# EAGLE board cansat (EAGLE 9.6.2)

Size 85 x 100 mm. Coordinates in mm from the lower left corner, seen from the top.
Outline: 0,0 85,0 85,100 0,100 0,0
Copper layers (1*16): Top 0.035mm / dielectric 1.5mm / Bottom 0.035mm
Design rules "PCBGoGo": minimum track width 6mil, minimum drill 0.2mm, track to track 6mil, track to pad 6mil, pad to pad 6mil, via to via 6mil, smd to smd 6mil, copper to edge 0.2mm, drill to drill 6mil, minimum pad ring 10mil, minimum via ring 8mil, stop-mask expansion 4mil, vias tented up to drill 0mil, thermal gap 10mil
Net classes: 1 esp: width 0.254 mm, drill 0.127 mm, clearance 0.025 mm; 2 GND_+12V: width 0.305 mm

## Footprints (pad centres in the part's own frame; a part is rotated, then mirrored left to right if it is on the bottom)
C0603 = smd 1.1 x 1: 1 -0.85,0; 2 0.85,0
AZ1117CH-3.3TRG1 = smd 1.2 x 2.2: 1 -2.3,-6.2; 2 0,-6.2; 3 2.3,-6.2 | smd 3.5 x 2.2: VOUT 0,0
3362P = drill 0.7 pad 1.27 square: CCW -2.54,2.54; CW 2.54,2.54; WIPER 0,0
BMX055 = drill 0.65 pad 1.5 square: 3V3 8.81,-9.53; GND 1.19,-4.46; SCL 1.19,-9.53; SDA 1.19,-7; VCC 8.81,-4.46; VCCIO 8.81,-7
C0402 = smd 0.7 x 0.9: 1 -0.65,0; 2 0.65,0
2PIN = drill 1.2 pad 2.5: 1 0,0; 2 5.08,0
TS-06104 = smd 1 x 1.8: A -2.25,4.1; B -2.25,-4.1; C 2.25,4.1; D 2.25,-4.1
ESP32-WROOM-32D = smd 2 x 0.9: 1_GND -7.5,7.62; 2_3V3 -7.5,6.35; 3_EN -7.5,5.08; 4_SENSOR_VP -7.5,3.81; 5_SENSOR_VN -7.5,2.54; 6_IO34 -7.5,1.27; 7_IO35 -7.5,0; 8_IO32 -7.5,-1.27; 9_IO33 -7.5,-2.54; 10_IO25 -7.5,-3.81; 11_IO26 -7.5,-5.08; 12_IO27 -7.5,-6.35; 13_IO14 -7.5,-7.62; 14_IO12 -7.5,-8.89; 25_IO0 9.5,-8.89; 26_IO4 9.5,-7.62; 27_IO16 9.5,-6.35; 28_IO17 9.5,-5.08; 29_IO5 9.5,-3.81; 30_IO18 9.5,-2.54; 31_IO19 9.5,-1.27; 32_NC 9.5,0; 33_IO21 9.5,1.27; 34_RXD0 9.5,2.54; 35_TXD0 9.5,3.81; 36_IO22 9.5,5.08; 37_IO23 9.5,6.35; 38_GND 9.5,7.62 | smd 0.9 x 2: 15_GND -4.715,-10.1; 16_IO13 -3.445,-10.1; 17_SD2 -2.175,-10.1; 18_SD3 -0.905,-10.1; 19_CMD 0.365,-10.1; 20_CLK 1.635,-10.1; 21_SD0 2.905,-10.1; 22_SD1 4.175,-10.1; 23_IO15 5.445,-10.1; 24_IO2 6.715,-10.1 | smd 1.33 x 1.33: GND@1 -1.8,1.835; GND@2 0,1.835; GND@3 1.835,1.835; GND@4 -1.8,0; GND@5 0,0; GND@6 1.835,0; GND@7 -1.8,-1.835; GND@8 0,-1.835; GND@9 1.835,-1.835
AE-GYSFDMAXB = drill 0.8 long: P1 13.716,5.08; P2 13.716,2.54; P3 13.716,0; P4 13.716,-2.54; P5 13.716,-5.08 | hole 3.2: -12,12; 12,12; 12,-12; -12,-12
IM920C = smd 0.3 x 1.1: $P1 -1.75,-13.45; $P2 -1.75,-9.55; $P3 -2.25,-13.45; $P4 -2.25,-9.55; $P5 -2.75,-13.45; $P6 -2.75,-9.55; $P7 -3.25,-13.45; $P8 -3.25,-9.55; $P9 -3.75,-13.45; $P10 -3.75,-9.55; $P11 -4.25,-13.45; $P12 -4.25,-9.55; $P13 -4.75,-13.45; $P14 -4.75,-9.55; $P15 -5.25,-13.45; $P16 -5.25,-9.55; $P17 -5.75,-13.45; $P18 -5.75,-9.55; $P19 -6.25,-13.45; $P20 -6.25,-9.55 | hole 2.5: 7,-12 | hole 2: -7,14
OSXX1608C1A = smd 0.8 x 0.8: AN -0.75,0; CT 0.75,0
BD6231F = smd 3.81 x 0.635: FIN -2.54,-1.905; GND 2.54,1.905; OUT1 -2.54,1.905; OUT2 2.54,0.635; RIN 2.54,-1.905; VCC1 -2.54,0.635; VCC2 -2.54,-0.635; VREF 2.54,-0.635
19_2.54 = drill 0.6 pad 1.27 square: P$1 0,12.7; P$2 0,10.16; P$3 0,7.62; P$4 0,5.08; P$5 0,2.54; P$6 0,0; P$7 0,-2.54; P$8 0,-5.08; P$9 0,-7.62; P$10 0,-10.16; P$11 0,-12.7; P$12 0,-15.24; P$13 0,-17.78; P$14 0,-20.32; P$15 0,-22.86; P$16 0,-25.4; P$17 0,-27.94; P$18 0,-30.48; P$19 0,-33.02
R0603 = smd 1 x 1.1: 1 -0.85,0; 2 0.85,0
R0201 = smd 0.28 x 0.43: 1 -0.255,0; 2 0.255,0
RASPBERRYPI4B = drill 0.6 square: 3V3_1 -2.54,-2.54; 3V3_2 -2.54,-22.86; 5V_1 0,-2.54; 5V_2 0,-5.08; GND_1 0,-7.62; GND_2 0,-17.78; GND_3 0,-25.4; GND_4 0,-38.1; GND_5 0,-43.18; GND_6 -2.54,-12.7; GND_7 -2.54,-33.02; GND_8 -2.54,-50.8; GPIO0 -2.54,-35.56; GPIO1 0,-35.56; GPIO2 -2.54,-5.08; GPIO3 -2.54,-7.62; GPIO4 -2.54,-10.16; GPIO5 -2.54,-38.1; GPIO6 -2.54,-40.64; GPIO7 0,-33.02; GPIO8 0,-30.48; GPIO9 -2.54,-27.94; GPIO10 -2.54,-25.4; GPIO11 -2.54,-30.48; GPIO12 0,-40.64; GPIO13 -2.54,-43.18; GPIO14 0,-10.16; GPIO15 0,-12.7; GPIO16 0,-45.72; GPIO17 -2.54,-15.24; GPIO18 0,-15.24; GPIO19 -2.54,-45.72; GPIO20 0,-48.26; GPIO21 0,-50.8; GPIO22 -2.54,-20.32; GPIO23 0,-20.32; GPIO24 0,-22.86; GPIO25 0,-27.94; GPIO26 -2.54,-48.26; GPIO27 -2.54,-17.78
3_2.54 = drill 0.7 pad 1.27 square: 1 -2.54,0; 2 0,0; 3 2.54,0
NPN_SS8050-G = smd 0.6 x 0.8: 1 -0.95,-2.02; 2 0.95,-2.02; 3 0,0
ESD5484FCT5G = smd 0.28 x 0.3: 1_CT -0.235,0; 2_AN 0.235,0
QFN50P500X500X80-29N = smd 1.01 x 0.27: 1 -2.36,1.5; 2 -2.36,1; 3 -2.36,0.5; 4 -2.36,0; 5 -2.36,-0.5; 6 -2.36,-1; 7 -2.36,-1.5; 15 2.36,-1.5; 16 2.36,-1; 17 2.36,-0.5; 18 2.36,0; 19 2.36,0.5; 20 2.36,1; 21 2.36,1.5 | smd 0.27 x 1.01: 8 -1.5,-2.36; 9 -1,-2.36; 10 -0.5,-2.36; 11 0,-2.36; 12 0.5,-2.36; 13 1,-2.36; 14 1.5,-2.36; 22 1.5,2.36; 23 1,2.36; 24 0.5,2.36; 25 0,2.36; 26 -0.5,2.36; 27 -1,2.36; 28 -1.5,2.36 | smd 3.25 x 3.25: 29 0,0
5V3A_KIC-053 = drill 0.7 pad 1.27 square: GND1 11.01,0; GND2 8.47,0; VADJ -14.39,0; VIN1 16.09,0; VIN2 13.55,0; VOUT1 -9.31,0; VOUT2 -11.85,0
3.3V0.5A_M78AR05-0.5 = drill 0.75 pad 1.27 square: GND 0,0; VIN 2.54,0; VOUT -2.54,0
GY-BMP280-FOOTPRINT = drill 0.6: CSB 11.43,0; GND 3.81,0; SCK 6.35,0; SDI 8.89,0; SDO 13.97,0; VCC 1.27,0 | hole 0.35: 1.27,7.62; 13.97,7.62
SSM6J808R = smd 0.44 x 0.33: D1 0,0; D2 0.95,0; D3 0.01,2.64; D4 0.95,2.64; G 1.9,0; S 1.9,2.64
SLIDESWITCH = drill 0.6 pad 1.422 square: A 0,0; B 5.08,0; C 2.54,0
4_2.54 = drill 0.7 pad 1.27 square: 1 -3.81,0; 2 -1.27,0; 3 1.27,0; 4 3.81,0
MICRO-B_ZX62R-B-5P = smd 0.4 x 1.35: 1 1.3,0; 2 0.65,0; 3 0,0; 4 -0.65,0; 5 -1.3,0 | smd 2.1 x 2: P$6 3.1,-0.325; P$7 -3.1,-0.325 | smd 1.6 x 1.9: P$8 -4.1,-2.675; P$9 4.1,-2.675 | smd 1.2 x 1.9: P$10 0.85,-2.675; P$11 -0.9,-2.675

## Placement (x,y rotation side)
0.1μF  [C0603]  67.31,60.96 0 top
3-REG2  [AZ1117CH-3.3TRG1]  55.88,91.44 0 top
100KR  100kR  [3362P]  6.86,64.77 90 top
100μF  [C0603]  73.66,60.96 0 top
BMX1  BMX055  [BMX055]  31.75,50.8 0 top
C1  4.7uF  [C0603]  80.01,60.96 0 top
C2  4.7uF  [C0603]  80.01,64.77 0 top
C3  4.7uF  [C0603]  80.01,68.58 0 top
C4  4.7uF  [C0603]  73.66,68.58 0 top
C5  4.7uF  [C0603]  67.31,68.58 0 top
C7  1000uF  [C0603]  60.96,60.96 0 top
C8  1000uF  [C0603]  54.61,60.96 0 top
C9  0.1uF  [C0603]  60.96,68.58 0 top
C10  0.1uF  [C0603]  54.61,68.58 0 top
C11  1000uF  [C0603]  80.01,72.39 0 top
C12  22uf  [C0603]  60.96,76.2 0 top
C13  22uf  [C0603]  54.61,76.2 0 top
C14  0.1uF  [C0603]  80.01,80.01 0 top
C15  0.1uF  [C0603]  73.66,80.01 0 top
C16  4.7uF  [C0402]  80.01,57.15 0 top
C17  0.1uF  [C0603]  67.31,80.01 0 top
C18  0.1uF  [C0603]  60.96,80.01 0 top
C19  22uF  [C0603]  67.31,76.2 0 top
C20  0.1uF  [C0603]  54.61,80.01 0 top
CONNECTOR1  2PIN  [2PIN]  2.54,96.52 0 top
EN1  TS-06104  [TS-06104]  50.8,20.32 0 top
ESP32_WROOM32D  ESP32-WROOM-32D  [ESP32-WROOM-32D]  54.86,40.64 0 top
GPS  AE-GYSFDMAXB  [AE-GYSFDMAXB]  24.13,17.78 0 top
IM  IM920C  [IM920C]  19.05,49.53 0 top
IO1  TS-06104  [TS-06104]  60.96,20.32 0 top
L2  OSXX1608C1A  [OSXX1608C1A]  74.93,43.18 90 top
MD_L  [BD6231F]  77.47,88.9 0 top
MD_R  [BD6231F]  66.04,88.9 0 top
OUT_MD_L  2PIN  [2PIN]  74.93,96.52 0 top
OUT_MD_R  2PIN  [2PIN]  63.5,96.52 0 top
PIN_L  19_2.54  [19_2.54]  44.45,35.56 0 top
PIN_R  19_2.54  [19_2.54]  67.31,35.56 0 top
R1  150R  [R0603]  73.66,76.2 0 top
R2  150R  [R0603]  73.66,64.77 0 top
R3  150R  [R0603]  67.31,64.77 0 top
R4  150R  [R0603]  60.96,64.77 0 top
R5  150R  [R0603]  54.61,64.77 0 top
R6  150R  [R0603]  80.01,76.2 0 top
R7  2.2kR  [R0603]  73.66,72.39 0 top
R8  2.2kR  [R0603]  67.31,72.39 0 top
R9  3.3kR  [R0603]  60.96,72.39 0 top
R10  3.3kR  [R0603]  54.61,72.39 0 top
R11  10kR  [R0603]  7.62,90.17 0 top
R14  2k  [R0201]  72.39,38.1 0 top
R15  10k  [R0201]  72.39,22.86 0 top
R16  10k  [R0201]  72.39,20.32 0 top
R17  2k  [R0201]  72.39,35.56 0 top
R18  10k  [R0201]  72.39,25.4 0 top
R19  22k  [R0201]  72.39,27.94 0 top
R20  47k  [R0201]  72.39,30.48 0 top
R21  10k  [R0201]  72.39,33.02 0 top
RASPBERRYPI_4B  [RASPBERRYPI4B]  5.08,53.34 0 top
SERVO1  [3_2.54]  35.56,96.52 0 top
SERVO2  [3_2.54]  27.94,96.52 0 top
T3  [NPN_SS8050-G]  63.5,8.89 0 top
T4  [NPN_SS8050-G]  63.5,12.7 0 top
TVC4  [ESD5484FCT5G]  74.93,38.1 0 top
TVC5  [ESD5484FCT5G]  74.93,33.02 0 top
TVC6  [ESD5484FCT5G]  74.93,35.56 0 top
U2  CP2102N-A01-GQFN28  [QFN50P500X500X80-29N]  55.63,10.67 0 top
U$1  OSXX1608C1A  [OSXX1608C1A]  77.47,43.18 90 top
U$2  OSXX1608C1A  [OSXX1608C1A]  80.01,43.18 90 top
U$3  OSXX1608C1A  [OSXX1608C1A]  80.01,48.26 90 top
U$4  OSXX1608C1A  [OSXX1608C1A]  77.47,48.26 90 top
U$5  OSXX1608C1A  [OSXX1608C1A]  74.93,48.26 90 top
U$6  OSXX1608C1A  [OSXX1608C1A]  72.39,48.26 90 top
U$7  5V3A_KIC-053  [5V3A_KIC-053]  30.48,74.93 0 top
U$8  3.3V0.5A_M78AR05-0.5  [3.3V0.5A_M78AR05-0.5]  6.35,74.93 270 top
U$9  GY-BPM280  [GY-BMP280-FOOTPRINT]  30.48,55.88 0 top
U$10  PCH_SSM6J808R  [SSM6J808R]  6.35,83.82 0 top
U$11  PCH_SSM6J808R  [SSM6J808R]  2.54,83.82 0 top
U$12  SLIDESWITCH  [SLIDESWITCH]  15.24,96.52 0 top
U$13  [4_2.54]  54.61,96.52 0 top
U$14  [4_2.54]  44.45,96.52 0 top
USB2  [MICRO-B_ZX62R-B-5P]  55.75,3.94 0 top

## Library data of the parts
0.1μF 100μF C1-C5 C7-C20 = rcl; SPICEPREFIX: C
3-REG2 = Chip 3-Terminal Regulator
100KR = TRIM_register
BMX1 = BMX055
CONNECTOR1 OUT_MD_L OUT_MD_R = 2pin_small
EN1 IO1 = Switches
ESP32_WROOM32D = ESP32
GPS = AE-GYSFDMAXB
IM = IM920
L2 U$1-U$6 = ChipLED
MD_L MD_R = Motor Driver
PIN_L PIN_R SERVO1 SERVO2 U$13 U$14 = JumperPins
R1-R11 R14-R21 = rcl; SPICEPREFIX: R
RASPBERRYPI_4B = RASPBERRYPI4B
T3 T4 = ChipTransister
TVC4-TVC6 = TVC Diode
U2 = CP2102N-A01-GQFN28; AVAILABILITY: In Stock; DESCRIPTION: USB Bridge, USB to UART USB 2.0 UART Interface 28-QFN (5x5); MF: Silicon Labs; MP: CP2102N-A01-GQFN28; PACKAGE: QFN-28 Silicon Labs; PRICE: None; PURCHASE-URL: https://pricing.snapeda.com/search/part/CP2102N-A01-GQFN28/?ref=eda
U$7 U$8 = DC-DC
U$9 = BMP280
U$10 U$11 = CHIPMOSFET
U$12 = SLIDESWITCH
USB2 = USB

## Nets
3V3: BMX1.3V3
+3V3: 3-REG2.2 3-REG2.VOUT C4.2 C5.2 C12.1 C16.1 C17.1 C18.1 C19.1 ESP32_WROOM32D.2_3V3 IM.$P17 PIN_L.P$1 R17.1 R21.2 U2.6 U2.7 U$8.VOUT U$9.CSB U$9.VCC
+5V: 3-REG2.3 100KR.CCW BMX1.VCC C1.1 C2.1 C3.1 C10.2 C11.2 C13.1 GPS.P1 PIN_L.P$19 R14.2 R19.1 RASPBERRYPI_4B.5V_1 SERVO1.2 SERVO2.2 TVC4.2_AN U$7.VOUT1 U$7.VOUT2 U$8.VIN U$13.3 U$14.3 USB2.1
+12V [GND_+12V]: C7.1 C8.1 C9.1 U$7.VIN1 U$7.VIN2 U$11.D4
+D: TVC6.2_AN U2.4 USB2.3
-D: TVC5.2_AN U2.5 USB2.2
AS_SCL: PIN_R.P$3 R7.2 U$13.1 U$14.1
AS_SDA: PIN_R.P$6 R8.2 U$13.2 U$14.2
BB_SCL: BMX1.SCL RASPBERRYPI_4B.GPIO3 U$9.SCK
BB_SDA: BMX1.SDA RASPBERRYPI_4B.GPIO2 U$9.SDI
CLK: ESP32_WROOM32D.20_CLK PIN_R.P$19
CMD: ESP32_WROOM32D.19_CMD PIN_L.P$18
CP_RX: ESP32_WROOM32D.35_TXD0 PIN_R.P$4 U2.25
CP_TX: ESP32_WROOM32D.34_RXD0 PIN_R.P$5 U2.26
CPVBUS: R19.2 R20.2 U2.8
DTR: R16.1 T4.2 U2.28
EN: C15.1 C20.1 EN1.D ESP32_WROOM32D.3_EN PIN_L.P$2 R21.1 T3.3
GND [GND_+12V]: 0.1μF.2 3-REG2.1 100KR.CW 100μF.2 BMX1.GND C1.2 C2.2 C3.2 C4.1 C5.1 C7.2 C8.2 C9.2 C10.1 C11.1 C12.2 C13.2 C14.2 C15.2 C16.2 C17.2 C18.2 C19.2 C20.2 CONNECTOR1.2 EN1.B ESP32_WROOM32D.1_GND ESP32_WROOM32D.15_GND ESP32_WROOM32D.32_NC ESP32_WROOM32D.38_GND ESP32_WROOM32D.GND@1 ESP32_WROOM32D.GND@2 ESP32_WROOM32D.GND@3 ESP32_WROOM32D.GND@4 ESP32_WROOM32D.GND@5 ESP32_WROOM32D.GND@6 ESP32_WROOM32D.GND@7 ESP32_WROOM32D.GND@8 ESP32_WROOM32D.GND@9 GPS.P2 IM.$P18 IO1.B L2.CT PIN_L.P$14 PIN_R.P$1 PIN_R.P$7 R9.1 R10.1 R18.2 R20.1 RASPBERRYPI_4B.GND_1 RASPBERRYPI_4B.GND_2 RASPBERRYPI_4B.GND_3 RASPBERRYPI_4B.GND_4 RASPBERRYPI_4B.GND_5 RASPBERRYPI_4B.GND_6 RASPBERRYPI_4B.GND_7 RASPBERRYPI_4B.GND_8 SERVO1.3 SERVO2.3 TVC4.1_CT TVC5.1_CT TVC6.1_CT U2.3 U2.29 U$1.CT U$2.CT U$3.CT U$4.CT U$5.CT U$6.CT U$7.GND1 U$7.GND2 U$8.GND U$9.GND U$9.SDO U$10.G U$12.A U$13.4 U$14.4 USB2.5
GPS_RX: GPS.P3 RASPBERRYPI_4B.GPIO14
GPS_TX: GPS.P4 RASPBERRYPI_4B.GPIO15
IM_BUSY: ESP32_WROOM32D.13_IO14 IM.$P1 PIN_L.P$12
IM_RESET: ESP32_WROOM32D.14_IO12 IM.$P19 PIN_L.P$13
IM_RX: ESP32_WROOM32D.28_IO17 IM.$P6 PIN_R.P$11
IM_TX: ESP32_WROOM32D.27_IO16 IM.$P7 PIN_R.P$12
IO5: ESP32_WROOM32D.29_IO5 PIN_R.P$10
IO13: ESP32_WROOM32D.16_IO13 PIN_L.P$15
IO27: ESP32_WROOM32D.12_IO27 PIN_L.P$11
LED1: ESP32_WROOM32D.6_IO34 PIN_L.P$5 R1.1
LED2: ESP32_WROOM32D.7_IO35 PIN_L.P$6 R2.1
LED3: IM.$P15 R3.1
LED4: R4.1 RASPBERRYPI_4B.GPIO17
LED5: R5.1 RASPBERRYPI_4B.GPIO27
LED6: R6.1 RASPBERRYPI_4B.GPIO22
MD_12V [GND_+12V]: 0.1μF.1 100μF.1 MD_L.VCC1 MD_L.VCC2 MD_L.VREF MD_R.VCC1 MD_R.VCC2 MD_R.VREF
MD_GND [GND_+12V]: MD_L.GND MD_R.GND
MD_LB: ESP32_WROOM32D.11_IO26 MD_L.RIN PIN_L.P$10
MD_LF: ESP32_WROOM32D.10_IO25 MD_L.FIN PIN_L.P$9
MD_RB: C14.1 ESP32_WROOM32D.25_IO0 IO1.D MD_R.RIN PIN_R.P$14 T4.3
MD_RF: ESP32_WROOM32D.26_IO4 MD_R.FIN PIN_R.P$13
N$1: R1.2 U$1.AN
N$2: R2.2 U$2.AN
N$3: R3.2 U$3.AN
N$4: R4.2 U$4.AN
N$5: R5.2 U$5.AN
N$6: R6.2 U$6.AN
N$7: ESP32_WROOM32D.36_IO22 R7.1 R9.2
N$8: ESP32_WROOM32D.33_IO21 R8.1 R10.2
N$9 [GND_+12V]: CONNECTOR1.1 U$10.D4
N$11 [GND_+12V]: R11.1 U$11.G U$12.C
N$12: 100KR.WIPER U$7.VADJ
N$13: L2.AN R14.1
N$14: R16.2 T3.1
N$15: R15.2 T4.1
N$16: R17.2 U2.9
N$17: R18.1 U2.11
N$18 [GND_+12V]: R11.2 U$10.S U$11.S
OUT_MD_L1 [GND_+12V]: MD_L.OUT1 OUT_MD_L.1
OUT_MD_L2 [GND_+12V]: MD_L.OUT2 OUT_MD_L.2
OUT_MD_R1 [GND_+12V]: MD_R.OUT1 OUT_MD_R.1
OUT_MD_R2 [GND_+12V]: MD_R.OUT2 OUT_MD_R.2
RP_MISO: ESP32_WROOM32D.31_IO19 PIN_R.P$8 RASPBERRYPI_4B.GPIO9
RP_MOSI: ESP32_WROOM32D.37_IO23 PIN_R.P$2 RASPBERRYPI_4B.GPIO10
RP_RX: ESP32_WROOM32D.24_IO2 PIN_R.P$15 RASPBERRYPI_4B.GPIO1
RP_SCK: ESP32_WROOM32D.30_IO18 PIN_R.P$9 RASPBERRYPI_4B.GPIO11
RP_SS: ESP32_WROOM32D.5_SENSOR_VN PIN_L.P$4 RASPBERRYPI_4B.GPIO8
RP_TX: ESP32_WROOM32D.23_IO15 PIN_R.P$16 RASPBERRYPI_4B.GPIO0
RTS: R15.1 T3.2 U2.24
SD0: ESP32_WROOM32D.21_SD0 PIN_R.P$18
SD1: ESP32_WROOM32D.22_SD1 PIN_R.P$17
SD2: ESP32_WROOM32D.17_SD2 PIN_L.P$16
SD3: ESP32_WROOM32D.18_SD3 PIN_L.P$17
SENSOR_VP: ESP32_WROOM32D.4_SENSOR_VP PIN_L.P$3
SERVO1: ESP32_WROOM32D.8_IO32 PIN_L.P$7 SERVO1.1
SERVO2: ESP32_WROOM32D.9_IO33 PIN_L.P$8 SERVO2.1
VCCIO: BMX1.VCCIO

## Tracks (layer width: path | path; a pad name or v marks a point on that pad's centre or on a via)
+3V3  (18 unrouted)
+5V  (22 unrouted)
+12V  (5 unrouted)
+D  (2 unrouted)
-D  (2 unrouted)
AS_SCL  (3 unrouted)
AS_SDA  (3 unrouted)
BB_SCL  (2 unrouted)
BB_SDA  (2 unrouted)
CLK  (1 unrouted)
CMD  (1 unrouted)
CP_RX  (2 unrouted)
CP_TX  (2 unrouted)
CPVBUS  (2 unrouted)
DTR  (2 unrouted)
EN  (6 unrouted)
GND  (80 unrouted)
GPS_RX  (1 unrouted)
GPS_TX  (1 unrouted)
IM_BUSY  (2 unrouted)
IM_RESET  (2 unrouted)
IM_RX  (2 unrouted)
IM_TX  (2 unrouted)
IO5  (1 unrouted)
IO13  (1 unrouted)
IO27  (1 unrouted)
LED1  (2 unrouted)
LED2  (2 unrouted)
LED3  (1 unrouted)
LED4  (1 unrouted)
LED5  (1 unrouted)
LED6  (1 unrouted)
MD_12V  (7 unrouted)
MD_GND  (1 unrouted)
MD_LB  (2 unrouted)
MD_LF  (2 unrouted)
MD_RB  (5 unrouted)
MD_RF  (2 unrouted)
N$1  (1 unrouted)
N$2  (1 unrouted)
N$3  (1 unrouted)
N$4  (1 unrouted)
N$5  (1 unrouted)
N$6  (1 unrouted)
N$7  (2 unrouted)
N$8  (2 unrouted)
N$9  (1 unrouted)
N$11  (2 unrouted)
N$12  (1 unrouted)
N$13  (1 unrouted)
N$14  (1 unrouted)
N$15  (1 unrouted)
N$16  (1 unrouted)
N$17  (1 unrouted)
N$18  (2 unrouted)
OUT_MD_L1  (1 unrouted)
OUT_MD_L2  (1 unrouted)
OUT_MD_R1  (1 unrouted)
OUT_MD_R2  (1 unrouted)
RP_MISO  (2 unrouted)
RP_MOSI  (2 unrouted)
RP_RX  (2 unrouted)
RP_SCK  (2 unrouted)
RP_SS  (2 unrouted)
RP_TX  (2 unrouted)
RTS  (2 unrouted)
SD0  (1 unrouted)
SD1  (1 unrouted)
SD2  (1 unrouted)
SD3  (1 unrouted)
SENSOR_VP  (1 unrouted)
SERVO1  (2 unrouted)
SERVO2  (2 unrouted)

## Text on the board
tPlace: +12V | GND | SERVO | +5V | GND | SERVO | +5V | GND | SCL | SDA | +5V | GND | SCL | SDA | +5V | GND | MD_R1 | MD_R2 | MD_L1 | MD_L2 | 3V3 | +5V